# Altium PCB PcbDoc Electric Guitar Distortion Effect Circuit.PcbDoc
Units mm, origin at the board's own origin, x right, y up, seen from the top; angles counter-clockwise.
Board outline 141.4 x 38.35 mm, 2 copper layers (Top Layer, Bottom Layer), stack 1.534 mm thick; 31 components, 18 nets, 78 pads, 0 vias.
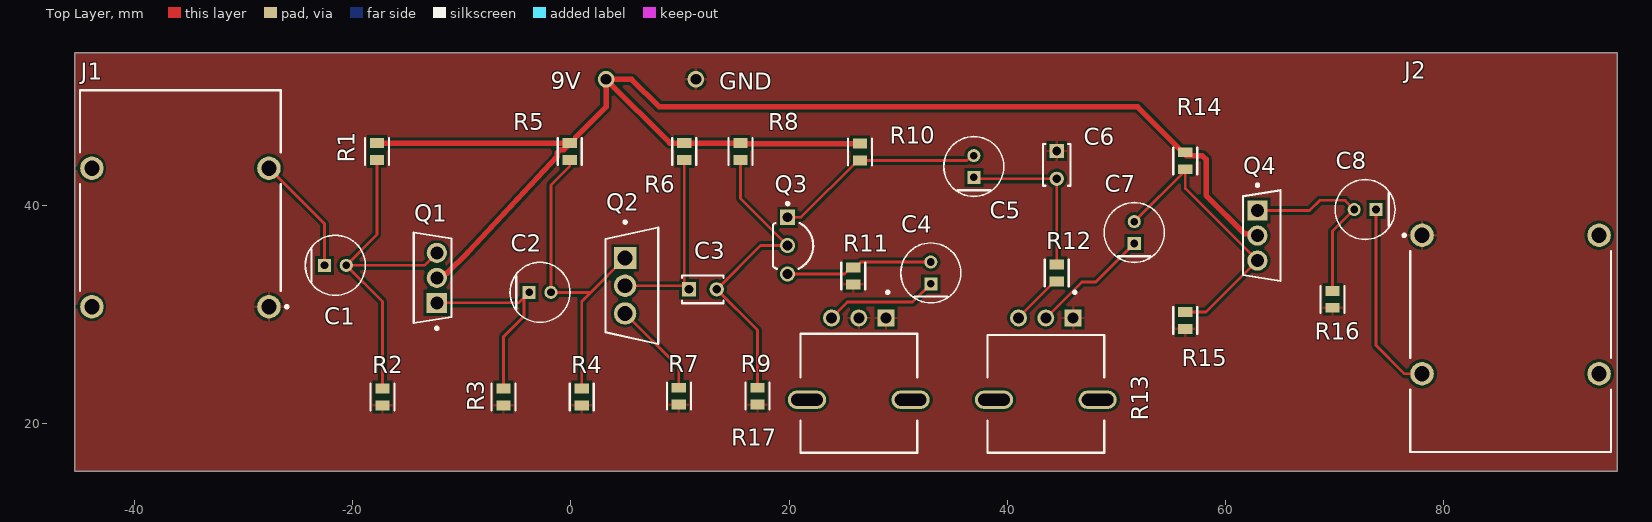
[diagram p0: Top Layer view]
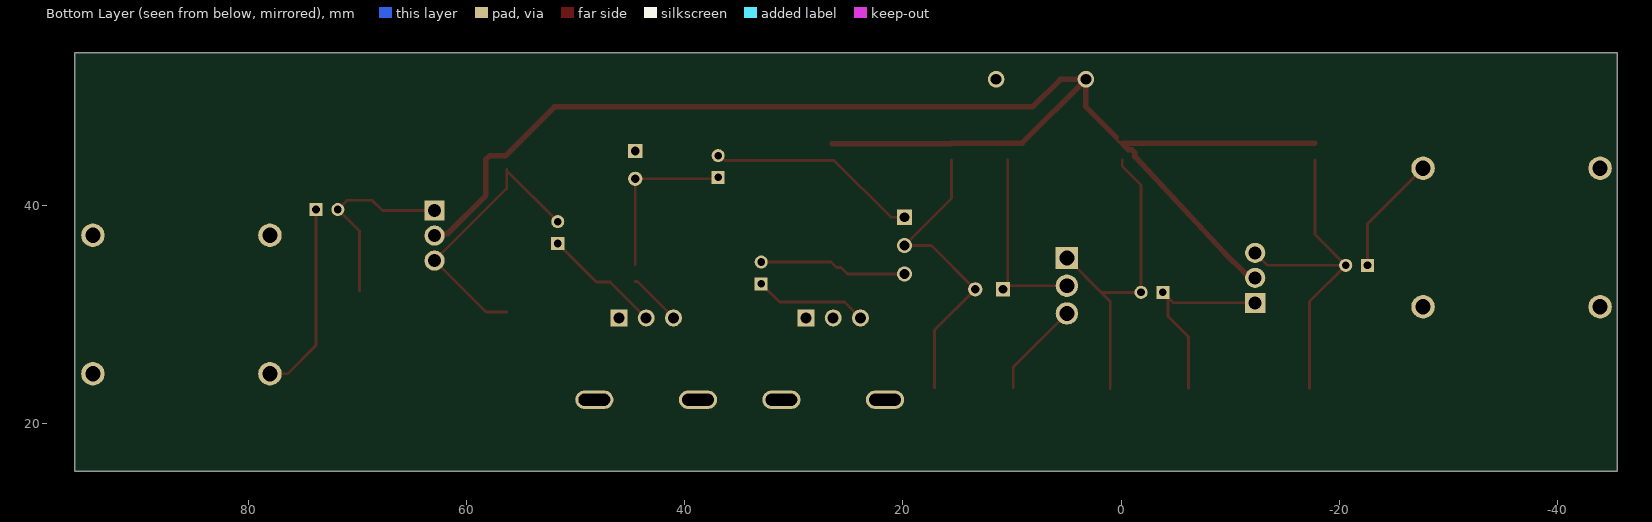
[diagram p1: Bottom Layer view, seen from below]
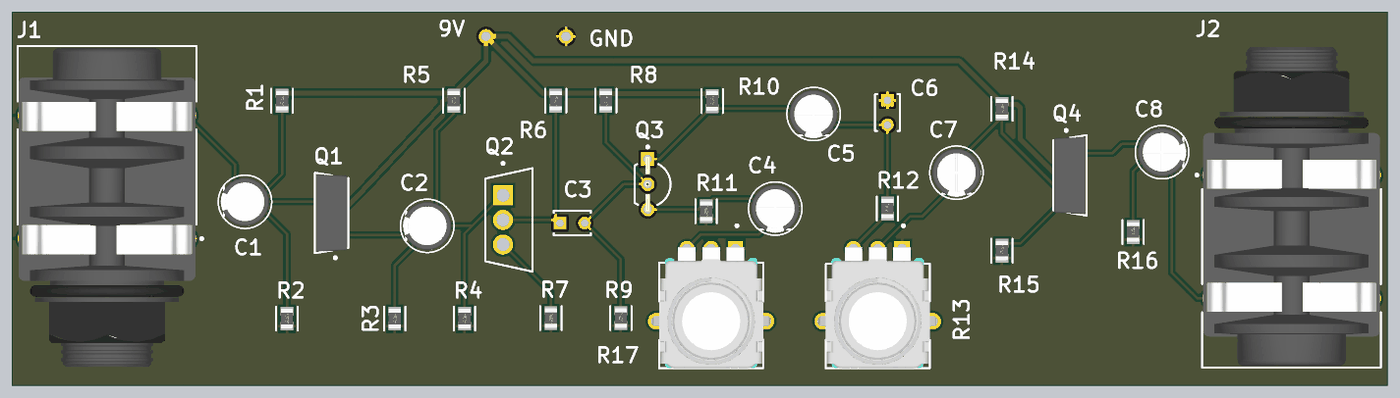
[diagram p2: 3D render of the assembled board from above, using the file's embedded part models]

## Layer stack, top to bottom
Top Solder: solder mask 0.0127, Solder Resist, Dk 3.3
Top Layer: signal copper 0.0178
Dielectric1: core 1.4986, FR-4, Dk 4.3
Bottom Layer: signal copper 0.0178
Bottom Solder: solder mask 0.0127, Solder Resist, Dk 3.3

## Board outline
-45.482,15.672 -45.482,54.026 95.917,54.026 95.917,15.672

## Design rules (kind name [scope] priority, off if disabled: settings)
Clearance [All] p1: gap=0.254 ignorepadtopadclearanceinfootprint=FALSE
DiffPairsRouting [All] p1: maxlimit=0.254 minlimit=0.254 mostfreqgap=0.254 toplayer_minwidth=0.254 toplayer_maxwidth=0.254 toplayer_prefwidth=0.254 bottomlayer_minwidth=0.254 bottomlayer_maxwidth=0.254 bottomlayer_prefwidth=0.254 maxuncoupledlength=12.7
HoleSize [All] p1: absolutevalues=TRUE maxlimit=7.62 minlimit=0.254 maxpercent=80.000 minpercent=20.000
MinimumAnnularRing [All] p1: minimumring=0.2
PasteMaskExpansion [All] p1: expansion=0.254
PlaneClearance [All] p1: clearance=0.381
PlaneConnect [All] p1: pad.planeconnectstyle=Relief pad.reliefexpansion=0.508 pad.reliefentries=4 pad.reliefconductorwidth=0.254 pad.reliefairgap=0.254 via.planeconnectstyle=Direct via.reliefexpansion=0.508 via.reliefentries=4 via.reliefconductorwidth=0.254 via.reliefairgap=0.254
PolygonConnect [All] p1: thpad.connectstyle=Relief thpad.reliefconductorwidth=0.254 thpad.reliefentries=4 thpad.polygonreliefangle="90 Angle" thpad.airgapwidth=0.254 smdpad.connectstyle=Relief smdpad.reliefconductorwidth=0.254 smdpad.reliefentries=4 smdpad.polygonreliefangle="90 Angle" smdpad.airgapwidth=0.254 via.connectstyle=Direct via.reliefconductorwidth=0.254 via.reliefentries=4 via.polygonreliefangle="90 Angle" via.airgapwidth=0.254
RoutingVias [All] p1: holewidth=0.254 width=0.508 viastyle="Through Hole" minholewidth=0.254 minwidth=0.508 maxholewidth=0.254 maxwidth=0.508
SMDNeckDown [All] p1: percent=100.000
SilkToSolderMaskClearance SilkscreenOverComponentPads [IsPad] p1: minsilkscreentomaskgap=0.254 clearancetoexposedcopper=TRUE
SolderMaskExpansion [All] p1: expansion=0.254 istentingtop=FALSE
SupplyNets "Schematic Supply Nets_1" [InNet('9V')] p1: voltage=0.000
SupplyNets "Schematic Supply Nets" [InNet('GND')] p2: voltage=0.000
Width [All] p1: maxlimit=1 minlimit=0.254 preferedwidth=0.254 bottomlayer_maxwidth=0.254 minimp=50.000000 maximp=50.000000 favimp=50.000000
24 further rules are at their usual default settings.

## Components (designator, comment, footprint, x,y, rotation, side; value= is the part's Value field where it differs from the comment)
C1 "1uF" FP-RAD-TH-D_5_0_5-L_11_1-MFG -21.587,34.535 r0 top
C2 "1uF" FP-RAD-TH-D_5_0_5-L_11_1-MFG -2.827,32.055 r0 top
C3 "10nF" KEMT-C315-THT-2 12.098,32.335 r0 top
C4 "10uF" FP-RAD-TH-D_5_0_5-L_11_1-MFG 32.991,33.838 r90 top
C5 "1uF" FP-RAD-TH-D_5_0_5-L_11_1-MFG 36.935,43.592 r90 top
C6 "10nF" KEMT-C315-THT-2 44.535,43.737 r270 top
C7 "1uF" FP-RAD-TH-D_5_0_5-L_11_1-MFG 51.638,37.541 r90 top
C8 "4.7uF" FP-RAD-TH-D_5_0_5-L_11_1-MFG 72.796,39.649 r180 top
J1 "NMJ4HFD2" FP-NMJ4HFD2-MFG -35.789,33.96 r270 top
J2 "NMJ4HFD2" FP-NMJ4HFD2-MFG 86.131,34.061 r90 top
Q1 "BD175" FP-340AS-MFG -12.675,33.385 r180 top
Q2 "IRFZ44N" FP-TO-220AB-MFG 5.588,32.664 r0 top
Q3 "BC337-40RL1G" ONSC-TO-92-3-29-11_AM_BL 19.862,36.347 r270 top
Q4 "BD175" FP-340AS-MFG 63.322,37.262 r0 top
R1 "470k" FP-CRGP0805-IPC_C -17.772,44.96 r90 top value=470KΩ
R2 "470k" FP-CRGP0805-IPC_C -17.272,22.479 r90 top value=470KΩ
R3 "1K" FP-CRGP0805-IPC_C -6.177,22.479 r90 top value=470KΩ
R4 "100k" FP-CRGP0805-IPC_C 1.004,22.479 r90 top value=470KΩ
R5 "120K" FP-CRGP0805-IPC_C -0.096,44.96 r90 top value=470KΩ
R6 "15k" FP-CRGP0805-IPC_C 10.398,44.96 r90 top value=470KΩ
R7 "1K" FP-CRGP0805-IPC_C 9.898,22.538 r90 top value=470KΩ
R8 "47k" FP-CRGP0805-IPC_C 15.551,44.96 r90 top value=470KΩ
R9 "27k" FP-CRGP0805-IPC_C 17.1,22.538 r90 top value=470KΩ
R10 "6.8k" FP-CRGP0805-IPC_C 26.502,44.922 r90 top value=470KΩ
R11 "4.7k" FP-CRGP0805-IPC_C 25.877,33.564 r90 top value=470KΩ
R12 "100k" FP-CRGP0805-IPC_C 44.535,33.838 r90 top value=470KΩ
R13 "10k" FP-RK09L1140A2U-MFG 43.535,23.038 r180 top value=10kΩ
R14 "1M" FP-CRGP0805-IPC_C 56.319,44.12 r90 top value=470KΩ
R15 "1M" FP-CRGP0805-IPC_C 56.319,29.489 r90 top value=470KΩ
R16 "1K" FP-CRGP0805-IPC_C 69.819,31.42 r90 top value=470KΩ
R17 "10k" FP-RK09L1140A2U-MFG 26.391,23.038 r180 top value=10kΩ

## Footprints (in the part's own frame and the unit in brackets; to place one, negate y for a bottom-side part, rotate by r counter-clockwise, add the part's x,y. Pads: shape width x height; smd on the part's side, far side on the other; paste and mask are expansions set on the pad)
FP-340AS-MFG [mm]
  rect 1.85x1.85 hole 1.2 paste-2539.97 mask+0: 1(-0.387,2.29)
  round 1.85 hole 1.2 paste-2539.97 mask+0: 2(-0.387,0) 3(-0.387,-2.29)
  silkscreen extent -1.73,-4.15 1.73,4.75, body extent -1.83,-4.25 1.83,4.25, height 0.25
FP-CRGP0805-IPC_C [mm]
  rect 0.906x1.31 smd paste+0 mask+0: 1(-0.776,0) 2(0.776,0)
  silkscreen extent -1.23,-1.1 1.23,1.1, body extent -1.33,-0.8 1.33,0.8, height 0.25
FP-NMJ4HFD2-MFG [mm]
  round 2.15 hole 1.4 paste-2539.97 mask+0: S(3.225,8.115) SN(3.225,-8.115) T(-9.475,8.115) TN(-9.475,-8.115)
  silkscreen extent -16.63,-9.2 3.35,9.88, body extent -16.73,-9.3 16.73,9.3, height 0.25
FP-RAD-TH-D_5_0_5-L_11_1-MFG [mm]
  rect 1.2x1.2 hole 0.7 paste-2539.97 mask+0: 1(-1,0)
  round 1.2 hole 0.7 paste-2539.97 mask+0: 2(1,0)
  silkscreen extent -2.75,-2.75 2.75,2.75, body extent -2.85,-2.85 2.85,2.85, height 0.25
FP-RK09L1140A2U-MFG [mm]
  rect 1.55x1.55 hole 1 paste-2539.97 mask+0: 1(-2.5,-6.675)
  round 1.55 hole 1 paste-2539.97 mask+0: 2(0,-6.675) 3(2.5,-6.675)
  rrect100% 3.5x1.7 hole 1.1 slot 2.9 at 0 deg paste-2539.97 mask+0: 4(-4.75,0.825) 5(4.75,0.825)
  silkscreen extent -5.35,-9.15 5.35,5.68, body extent -6.6,-7.55 6.6,5.77, height 0.25
FP-TO-220AB-MFG [mm]
  rect 2.05x2.05 hole 1.35 paste-2539.97 mask+0: 1(-0.62,2.54)
  round 2.05 hole 1.35 paste-2539.97 mask+0: 2(-0.62,0) 3(-0.62,-2.54)
  silkscreen extent -2.41,-5.34 2.41,5.96
KEMT-C315-THT-2 [mm] "THD, 2-Leads, Body 3.81x2.54mm"
  rect 1.3x1.3 hole 0.8: 1(-1.27,0)
  round 1.3 hole 0.8: 2(1.27,0)
  silkscreen extent -1.91,-1.27 1.91,1.27, body extent -1.91,-1.27 1.91,1.27, height 4.66
ONSC-TO-92-3-29-11_AM_BL [mm] "TO, 3-Leads, Body Dia 4.7mm, Pitch 2.6mm"
  rect 1.4x1.4 hole 0.9: 1(-2.6,0)
  round 1.4 hole 0.9: 2(0,0) 3(2.6,0)
  silkscreen extent -3.97,-1.34 2.13,2.35, body extent -2.84,-1.34 2.84,2.35, height 5.33

## Part data
C1 C2 C5 C7: library part CMP-05427-001266-1, "Aluminum Electrolytic Capacitors (Radial Lead Type) 1uF ±20% 50V", Case/Package=Radial, Max Operating Temperature=105°C, Min Operating Temperature=-40°C, Package Quantity=2000, Ripple Current=8mA, Tolerance=20%, Voltage Rating=50V, Capacitance=1uF, Diameter=5mm, Height=11mm, Height - Seated (Max)=0.472inch, Lead Diameter=0.5mm, Lead Pitch=5mm, Length=11mm, Life (Hours)=5000Hour, Mount="Through Hole", Packaging="Tape and Reel", Radiation Hardening=No, RoHS Compliant=Yes, Series=EB, Termination=Radial, Voltage Rating (DC)=50V
C3 C6: library part CMP-1664-00007-1, "Capacitor, Ceramic, 0.01 uF, +/- 10%, 100 V, X7R, -55 to 125 degC, 2-Pin THD, RoHS, Bulk", Case\Package=PDIP, Forward Current="60 mA", Forward Voltage="1.5 V", Max Operating Temperature="100 degC", Max Power Dissipation="400 mW", Min Operating Temperature="-55 degC", Output Voltage="70 V", Package Quantity=2000, Channels=2, ComponentLink1Description="Manufacturer URL", ComponentLink1URL=http://www.kemet.com/, ComponentLink2Description=Datasheet, ComponentLink2URL=http://capacitoredge.kemet.com/capedge2/DataSheet/Datasheet-C315C103K1R5TA.pdf?pn=C315C103K1R5TA{BULK}, DatasheetVersion=Aug-16, Mount="Through Hole", Nominal Vf="1.3 V", PackageDescription="2-Pin Through Hole Device, Body 3.81 x 2.54 mm", PackageReference=C315-THT-2, Packaging=Rail/Tube, Pins=16, Radiation Hardening=No, REACH SVHC=Unknown, RoHSCompliant=true, Vce Max="500 mV"
C4: library part CMP-05427-000246-1, "Aluminum Electrolytic Capacitors (Radial Lead Type) 10uF ±20% 50V", RoHS Compliant=Yes
C8: library part CMP-05427-000256-1, "Aluminum Electrolytic Capacitors (Radial Lead Type) AEC-Q200 Qualified 4.7uF ±20% 50V", Case/Package=Radial, ESR (Equivalent Series Resistance)=1.3R, Max Operating Temperature=105°C, Min Operating Temperature=-55°C, Package Quantity=2000, Ratings=AEC-Q200, Ripple Current=95mA, Tolerance=20%, Voltage Rating=50V, Capacitance=4.7uF, Contact Plating=Tin, Diameter=5mm, Features="General Purpose", Height=11mm, Height - Seated (Max)=0.472inch, Lead Diameter=0.5mm, Lead Pitch=2.5mm, Length=11mm, Life (Hours)=1000Hour, Mount="Through Hole", Packaging="Ammo Pack", Polarity=Polar, Radiation Hardening=No, RoHS Compliant=Yes, Series=FC, Termination=Radial, Voltage Rating (DC)=50V, Impedance=1.3R
J1 J2: library part CMP-78736-000001-1, "Conn 1/4\" Mono Jack F 3 POS Solder RA Thru-Hole 3 Terminal 1 Port", Current Rating=0.5A, Manufacturer=Neutrik, Package=0, Temperature="-25°C to +70°C", Temperature Range High=+70°C, Temperature Range Low=-25°C, Voltage Rating=50V, Automotive=No, Category=Conn, ComponentLink2Description=Datasheet, ComponentLink2URL=https://www.neutrik.com/en/product/nmj4hfd2.pdf, Conn Orientation=Horizontal, Contact Material=Silver, Device Class L1=Connectors, Device Class L2="Audio / Video Connectors", Device Class L3=unset, Footprint Url=https://www.neutrik.com/media/8576/download/st-nmj4hfd2.pdf?v=1, Height=15.89mm, Lead Free=Yes, Manufacturer Part Number=NMJ4HFD2, Mouser Description="Phone Audio Connector, Socket, 2, PCB Mount, Metal Body, Silver Plated Contacts", Number Of Contacts=2, Octopart=https://octopart.com/nmj4hfd2-neutrik-758952, RoHS=TRUE, Is Female=yes
Q1 Q4: library part CMP-013-00036-1, "npn", Case/Package=TO-126, Frequency=15MHz, Max Operating Temperature=150°C, Min Operating Temperature=-55°C, Mounting Technology="Through Hole", Pins=3
Q2: library part CMP-013-00037-1, Case/Package=TO-220AB, Pins=3
Q3: library part CMP-1048-01582-1, "Amplifier Transistor, NPN Silicon, 3-Pin TO-92, Pb-Free, Tape and Reel", Manufacturer="On Semiconductor", ComponentLink1Description="Manufacturer URL", ComponentLink1URL=http://www.onsemi.com/, ComponentLink2Description=Datasheet, ComponentLink2URL=http://www.onsemi.com/pub_link/Collateral/BC337-D.PDF, ComponentLink3Description="Package Specification", ComponentLink3URL=http://www.onsemi.com/pub_link/Collateral/MAC97-D.PDF, DatasheetVersion="Rev. 8", Mounting Technology="Through Hole", PackageDescription="3-Pin Transistor Outline, Body 4.825 x 3.685 mm, Pitch 1.27 mm", PackageReference=TO-92-3-29-11_AM_BL, PackageVersion="Rev. AM", Packing="Tape and Reel", PartNumber=BC337-40RL1G, Polarity=NPN, RoHS=TRUE, IC Continuous (A)=0.8
R1 R2 R3 R4 R5 R6 R7 R8 R9 R10 R11 R12 R14 R15 R16: library part CMP-03211-007232-1, "CRGP0805 470KΩ 0.33W ±100ppm/°C 1% 150V", Ambient Temperature Range High=+70°C, Manufacturer=TE, Manufacturer Part Number=CRGP0805F470K, Package=CRGP0805, Power Rating=0.33W, Resistance=470KΩ, Temperature="-55°C to +155°C", Temperature Coefficient=±100ppm/°C, Temperature Range High=+155°C, Temperature Range Low=-55°C, Tolerance=0.01, Voltage Rating=150V, Automotive=No, Category=Res, ComponentLink2Description=Datasheet, ComponentLink2URL=https://www.mouser.com/datasheet/2/418/NG_DS_9-1773463-9_A-1358566.pdf, Composition="Thick Film", Device Class L1="Passive Components", Device Class L2=Resistors, Device Class L3="Chip SMD Resistors", Height=0.65mm, Lead Free=Yes, Octopart=https://octopart.com/crgp0805f470k-te+connectivity-91018821, RoHS=TRUE, Series=CRGP, Ipc Land Pattern Name=RESC200125X55
R13 R17: library part CMP-24118-000002-1, "9mm Size Metal Shaft Snap-in Type RK09L Series", Manufacturer=ALPS, Manufacturer Part Number=RK09L1140A2U, Power Rating=0.05W, Resistance=10kΩ, Temperature="-10°C to +70°C", Temperature Range High=+70°C, Temperature Range Low=-10°C, Tolerance=20%, Voltage Rating=50V, Automotive=No, Category=Res, ComponentLink2Description=Datasheet, ComponentLink2URL=https://www.alps.com/prod/info/E/HTML/Potentiometer/RotaryPotentiometers/RK09L/RK09L1140A2U.html, Device Class L1="Passive Components", Device Class L2=Resistors, Device Class L3="Variable Resistors and Potentiometers", Height=30mm, Lead Free=Yes, Octopart=https://octopart.com/rk09l1140a2u-alps-7850070, Package=RK09L1140A2U, RoHS=TRUE, Series=RK09L, Standoff Height=2.55mm

## Free pads (board coordinates)
  round 1.524 hole 1: 1(3.226,51.587) 1(11.455,51.587)

## Nets (pads, with @x,y where several pads share a name; then routed paths per layer and width w, separated by ;. In a path a pad name is that pad's centre, name@x,y a point inside that pad or via, vN(x,y) a via of type N, cw(c..) or ccw(c..) an arc to the next point about the centre after c; other vN are vias at no path point)
9V: pad.1@3.226,51.587 Q1.2 Q4.2 R1.2 R5.2 R6.2 R8.2 R10.2 R14.2 | length 136
  Top Layer w0.254: R5.2 0.105,45.736 0.431,46.062 0.431,46.264 ; R8.2 R8.2@15.59,45.698
  Top Layer w0.5: R1.2 -0.286,45.736 R5.2 -0.286,45.533 -0.51,45.294 -0.662,45.141 -0.96,45.141 -1.255,44.846 -1.255,44.495 -9.437,35.73 -9.449,35.718 -11.35,33.816 -11.491,33.816 -11.922,33.385 Q1.2 ; 0.431,46.264 3.226,49.059 pad.1@3.226,51.587 ; R8.2 R6.2 9.077,45.736 pad.1@3.226,51.587 ; R8.2@15.59,45.698 R10.2 ; Q4.2 62.768,37.429 61.733,37.429 58.228,40.934 58.228,44.237 57.895,44.57 56.443,44.57 51.955,49.059 8.103,49.059 5.574,51.587 pad.1@3.226,51.587
GND: C6.1 J1.S J2.S pad.1@11.455,51.587 R2.1 R3.1 R4.1 R7.1 R9.1 R11.1 R13.1 R15.1 R16.1 R17.1 R17.2
NetC1_1: C1.1 J1.T | length 11
  Top Layer w0.254: J1.T -22.587,38.349 C1.1
NetC1_2: C1.2 Q1.3 R1.1 R2.2 | length 32.2
  Top Layer w0.254: R1.1 -17.772,37.351 C1.2 ; R2.2 -17.272,31.22 C1.2 ; Q1.3 -13.427,34.535 C1.2
NetC2_1: C2.1 Q1.1 R3.2 | length 18.6
  Top Layer w0.254: Q1.1 -4.788,31.095 C2.1 -4.3,31.582 -4.3,29.863 -6.177,27.986 R3.2
NetC2_2: C2.2 Q2.1 R4.2 R5.1 | length 30.1
  Top Layer w0.254: R5.1 -0.096,43.631 -1.827,41.9 C2.2 1.818,32.055 ; R4.2 1.004,31.24 1.818,32.055 ; Q2.1 1.818,32.055
NetC3_1: C3.1 Q2.2 R6.1 | length 18
  Top Layer w0.254: Q2.2 10.498,32.664 C3.1 10.398,32.765 R6.1
NetC3_2: C3.2 Q3.2 R8.1 R9.2 | length 28.3
  Top Layer w0.254: R8.1 15.551,40.658 Q3.2 17.381,36.347 C3.2 17.1,28.602 R9.2
NetC4_1: C4.1 R17.3 | length 10.4
  Top Layer w0.254: R17.3 25.341,31.163 31.315,31.163 C4.1
NetC4_2: C4.2 Q3.3 R11.2 | length 13.6
  Top Layer w0.254: Q3.3 25.083,33.747 25.676,34.34 R11.2 26.079,34.34 26.578,34.838 C4.2
NetC5_1: C5.1 C6.2 R12.2 | length 15.5
  Top Layer w0.254: C5.1 37.061,42.467 C6.2 R12.2
NetC5_2: C5.2 Q3.1 R10.1 | length 19.4
  Top Layer w0.254: Q3.1 21.102,38.947 26.301,44.145 36.313,44.145 36.76,44.592 C5.2
NetC7_1: C7.1 R13.2 | length 10.9
  Top Layer w0.254: R13.2 46.837,33.014 48.111,33.014 C7.1
NetC7_2: C7.2 Q4.3 R14.1 R15.2 | length 26.4
  Top Layer w0.254: C7.2 56.319,43.222 R14.1 56.319,41.587 Q4.3 58.228,30.265 R15.2
NetC8_1: C8.1 J2.T | length 17.7
  Top Layer w0.254: C8.1 73.796,27.211 76.421,24.586 J2.T
NetC8_2: C8.2 Q4.1 R16.2 | length 17.9
  Top Layer w0.254: Q4.1 67.703,39.552 68.644,40.493 70.953,40.493 C8.2 69.819,37.672 R16.2
NetQ2_3: Q2.3 R7.2 | length 8.9
  Top Layer w0.254: Q2.3 9.898,25.195 R7.2
NetR12_1: R12.1 R13.3 | length 4.9
  Top Layer w0.254: R13.3 41.035,29.764 44.333,33.062 R12.1
pads on no net: J1.SN J1.TN J2.SN J2.TN R13.4 R13.5 R17.4 R17.5

## Polygon pours and split planes (outlines as drawn)
GND on Top Layer "GND_L01_P000" (solid, pour order 0): -45.482,54.026 -45.482,15.672 95.917,15.672 95.917,54.026 -45.482,54.026

## Silkscreen, mask and mechanical layers (free items; w line width, h text height)
Top Overlay:
  text "9V" at -1.827,50.685 h1.52
  text "GND" at 13.622,50.65 h1.52
Board:
  the board outline again, w0.254